# Altium PCB Copy of UAC_V1_1.PcbDoc
Units mm, origin at the board's own origin, x right, y up, seen from the top; angles counter-clockwise.
Board outline 29.34 x 44.07 mm, 4 copper layers (Top Layer, Int1, Int2, Bottom Layer), stack 1.369 mm thick; 82 components, 51 nets, 288 pads, 147 vias.
Unrouted connection lines stored in the file: 11.
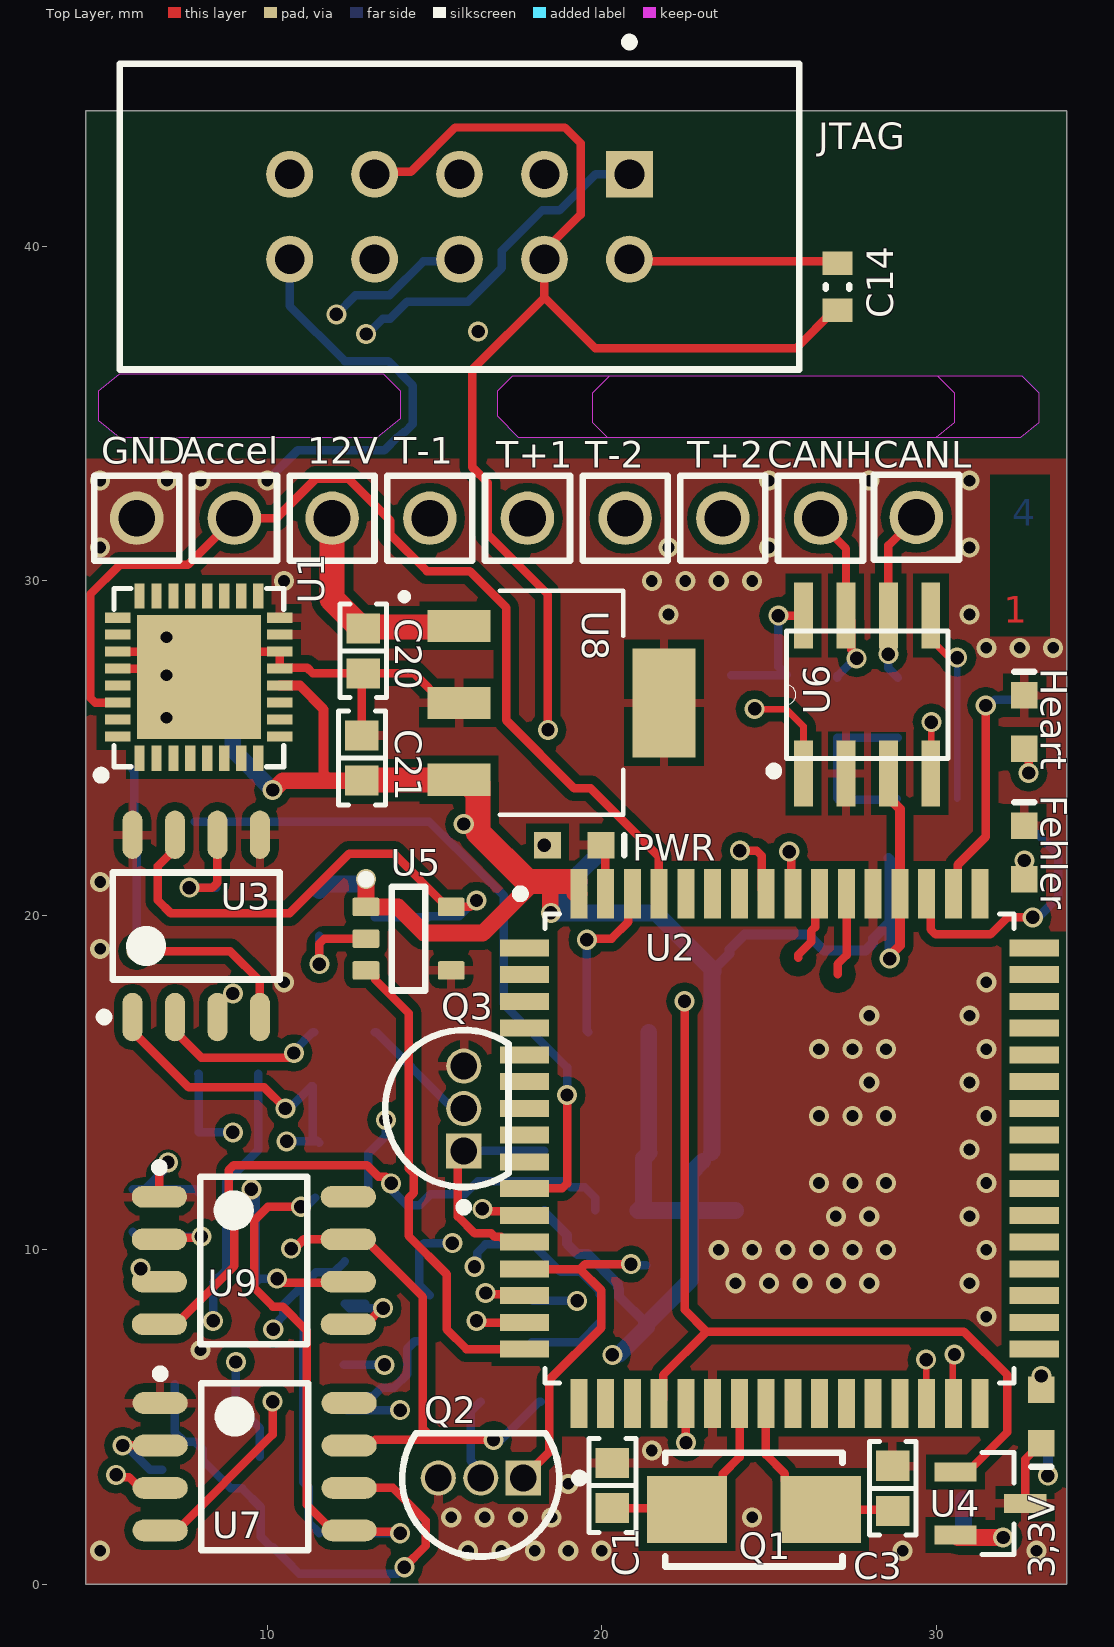
[diagram p0: Top Layer view]
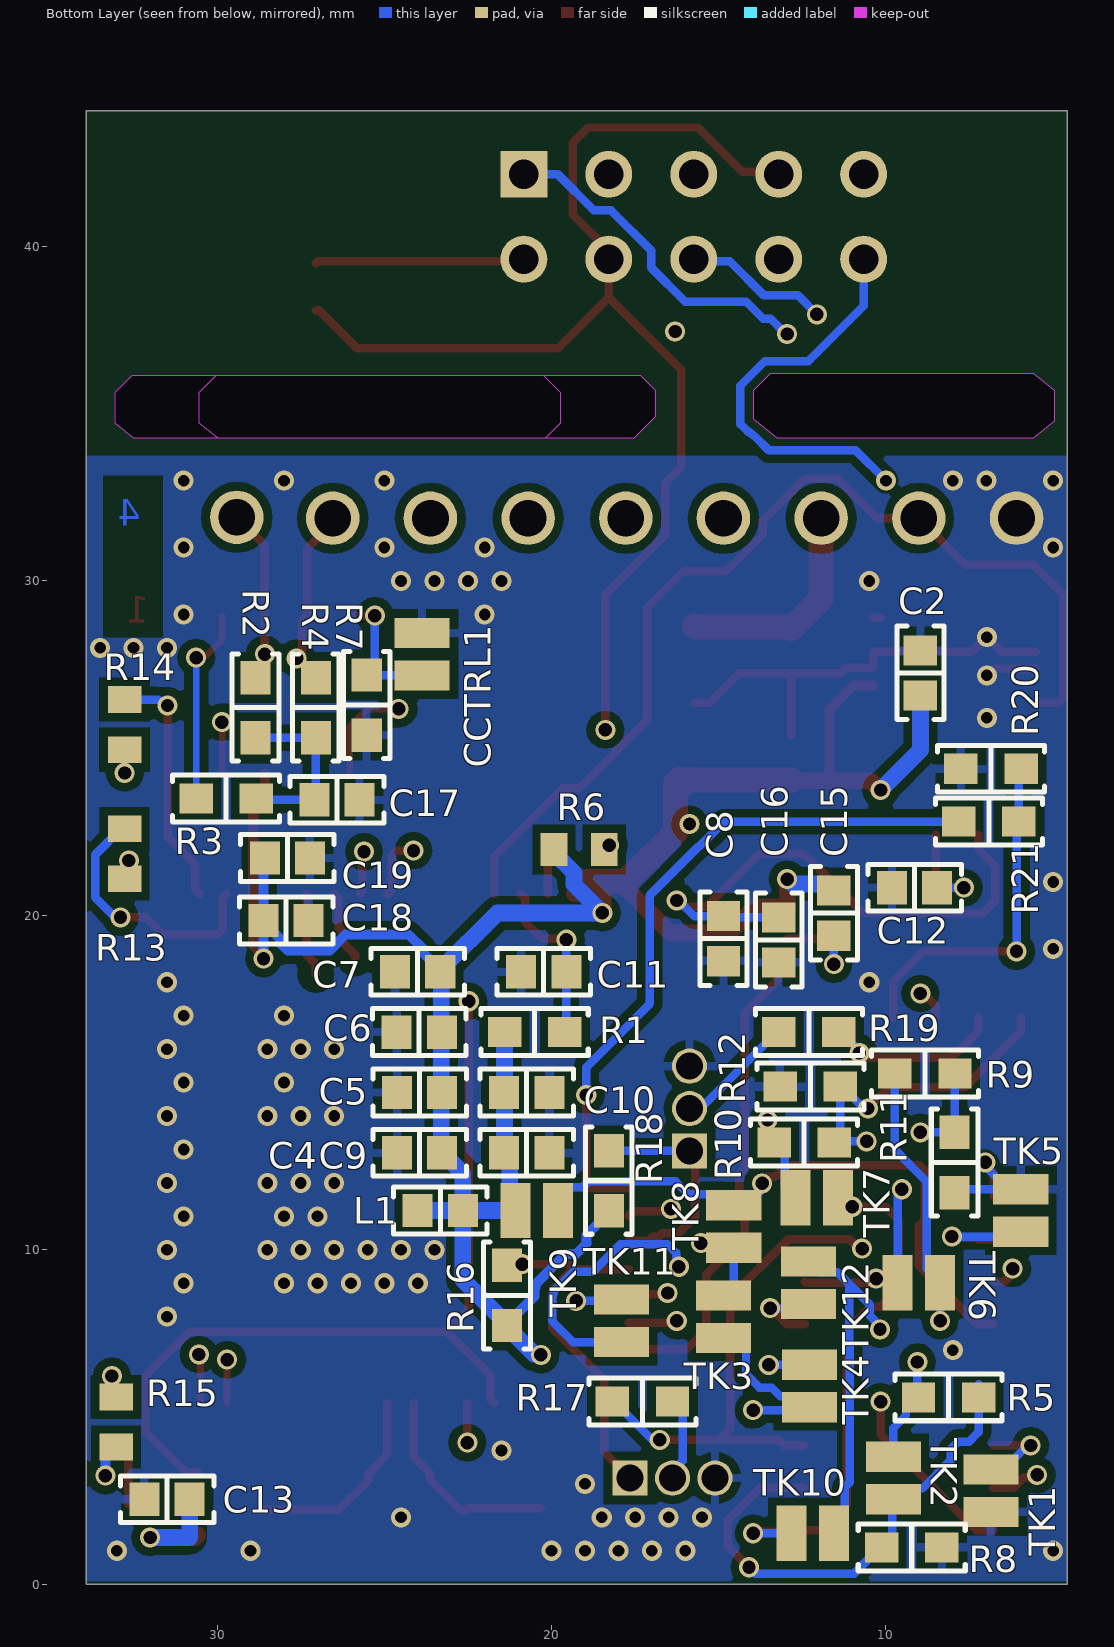
[diagram p1: Bottom Layer view, seen from below]
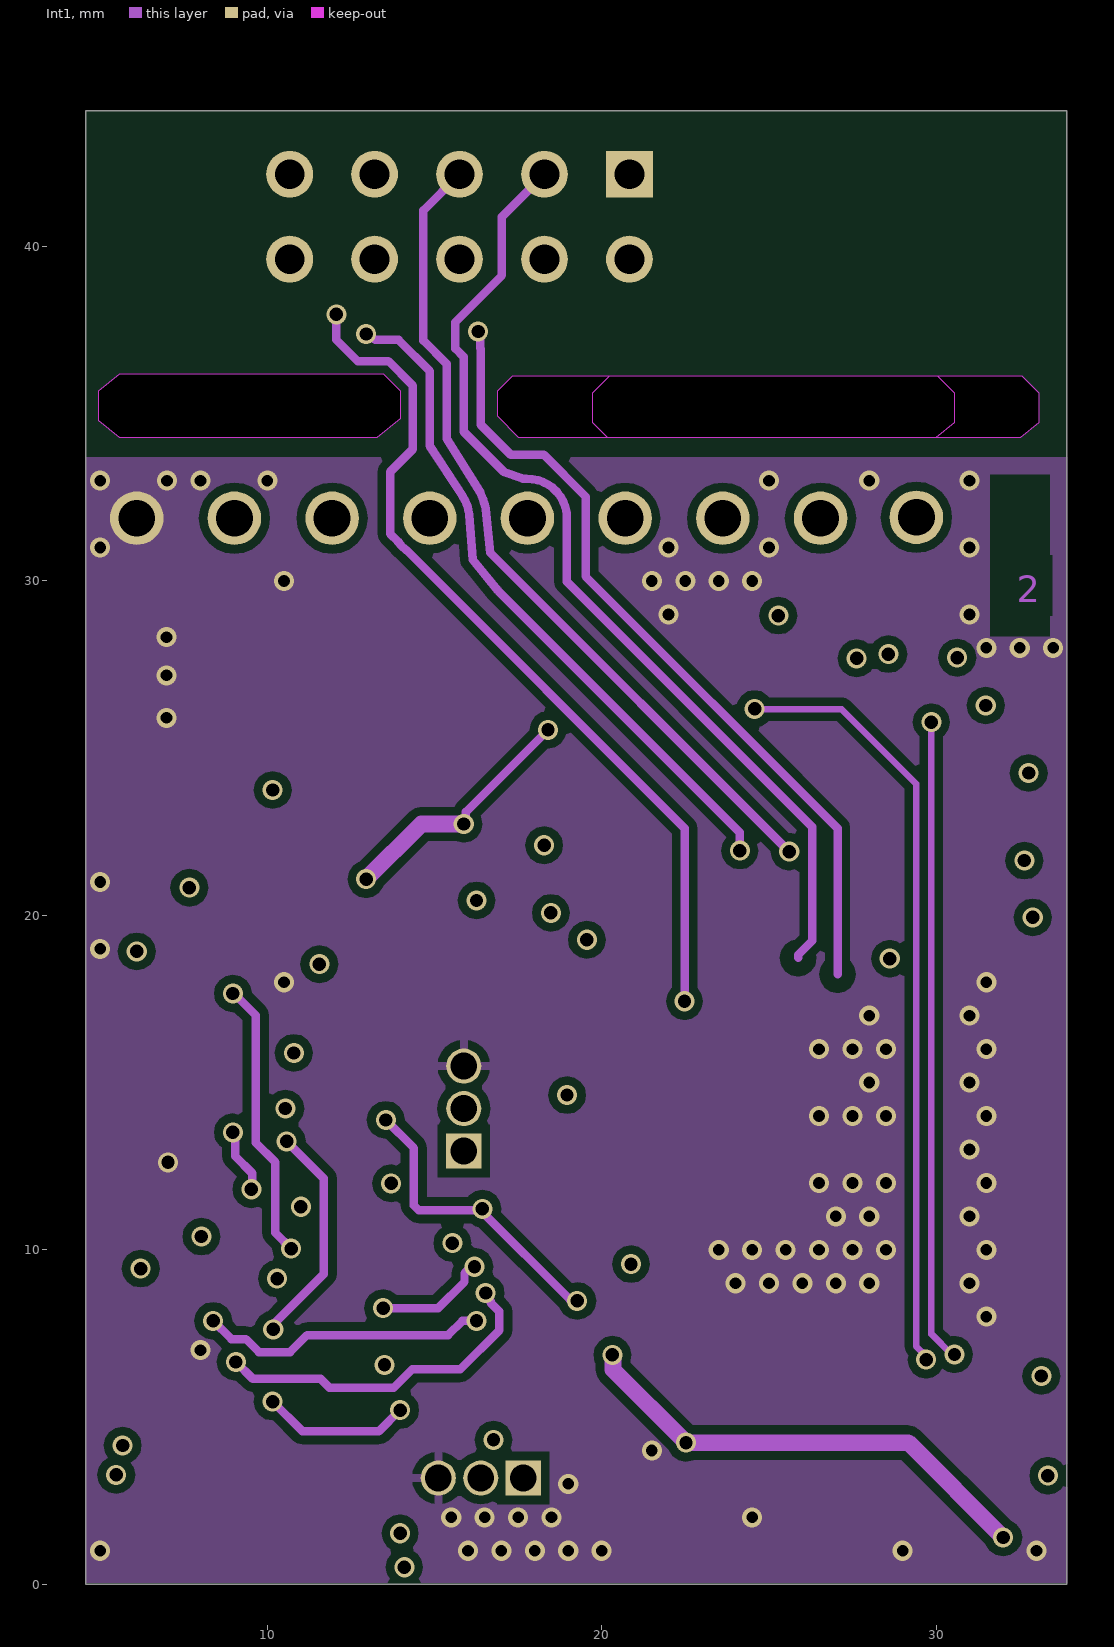
[diagram p2: Int1]
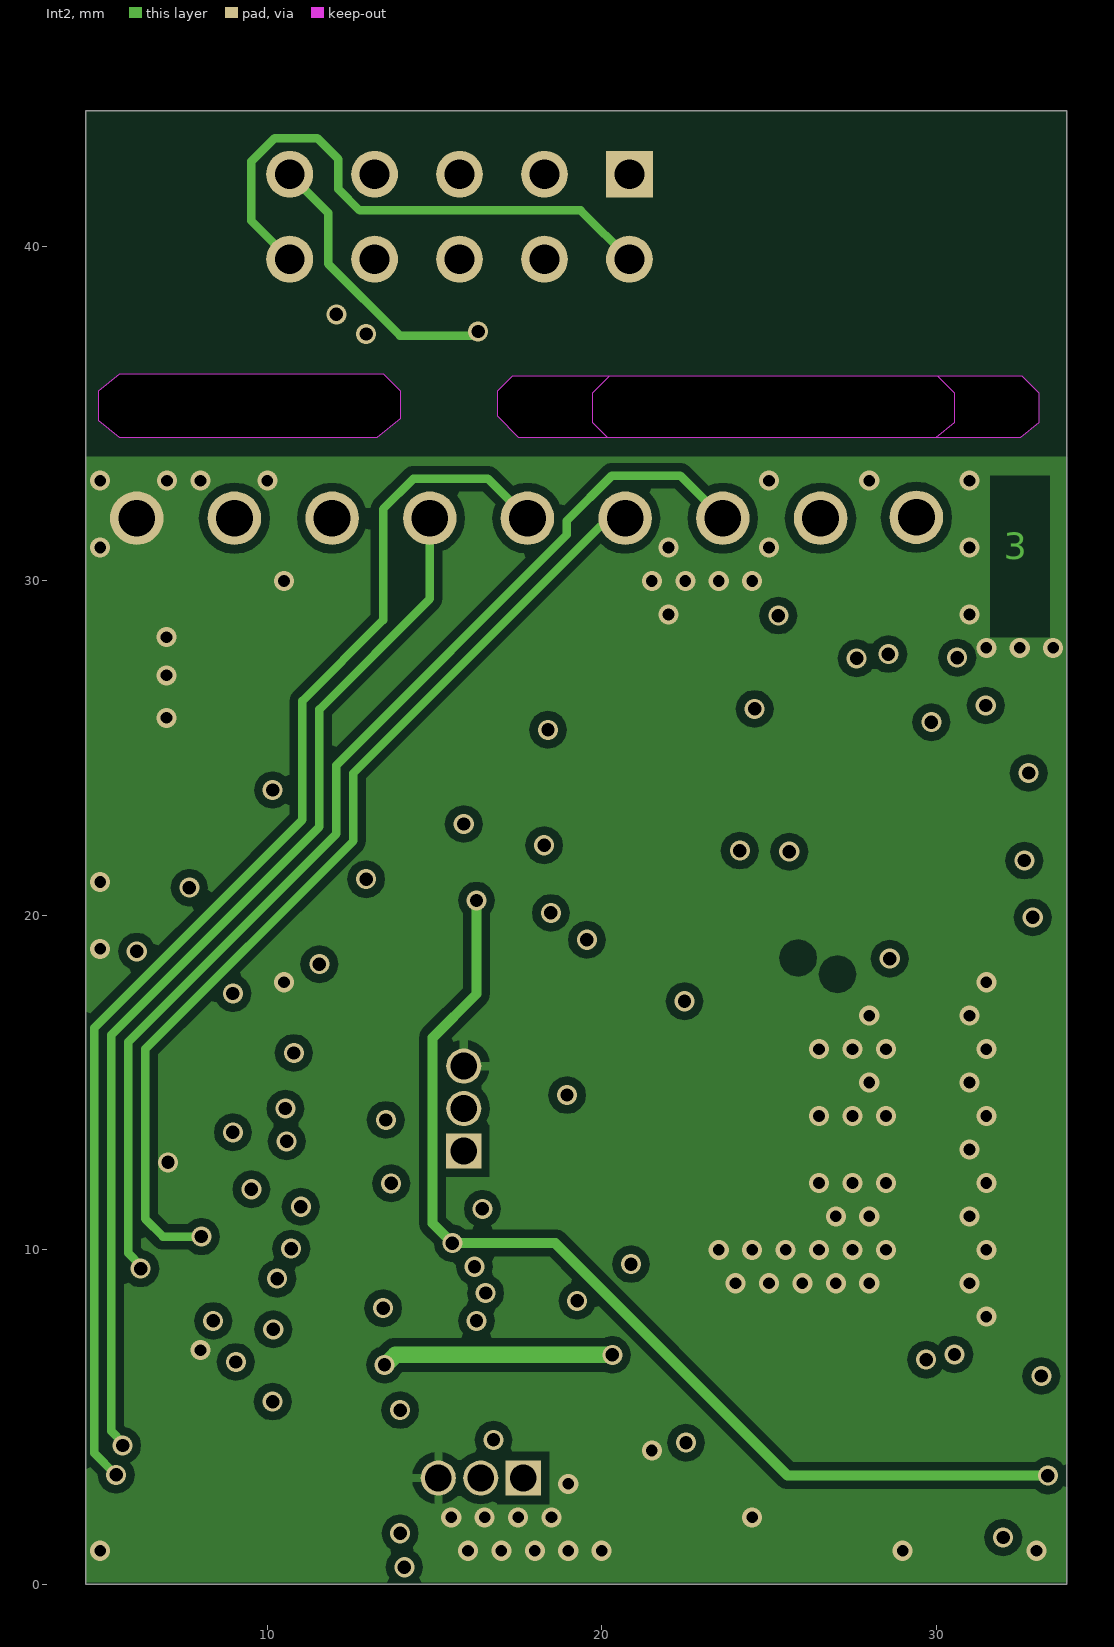
[diagram p3: Int2]

## Layer stack, top to bottom
Top Solder: solder mask 0.0254, SM-001, Dk 4
Top Layer: signal copper 0.035
Dielectric 1: prepreg 0.1295, PP-017, Dk 4.3
Dielectric 2: prepreg 0.1295, PP-017, Dk 4.3
Int1: signal copper 0.035
Dielectric 3: core 0.7112, Core-039, Dk 4.8
Int2: signal copper 0.035
Dielectric 4: prepreg 0.1295, PP-017, Dk 4.3
Dielectric 5: prepreg 0.1295, PP-017, Dk 4.3
Bottom Layer: signal copper 0.035
Bottom Solder: solder mask 0.0254, SM-001, Dk 4

## Board outline
4.572,0 33.909,0 33.909,44.069 4.572,44.069
cut-out: 4.953,34.798 4.953,35.687 5.588,36.195 13.462,36.195 13.97,35.687 13.97,34.849 13.271,34.29 5.588,34.29
cut-out: 19.733,34.734 19.733,35.623 20.241,36.131 32.56,36.131 33.068,35.623 33.068,34.734 32.512,34.29 20.177,34.29
cut-out: 16.891,34.925 16.891,35.687 17.335,36.131 30.035,36.131 30.543,35.623 30.543,34.734 29.988,34.29 17.526,34.29

## Design rules (kind name [scope] priority, off if disabled: settings)
Clearance [All] p1: gap=0.254 ignorepadtopadclearanceinfootprint=FALSE except(0: Arc-Hole Track-Hole SMDPad-Hole THPad-Hole Via-Hole Fill-Hole Poly-Hole Region-Hole Text-Hole)
PolygonConnect [All] p1: connectstyle=Relief reliefconductorwidth=0.254 reliefentries=4 polygonreliefangle="90 Angle" airgapwidth=0.254
RoutingVias [All] p1: holewidth=0.4 width=0.6 viastyle="Through Hole" minholewidth=0.2 minwidth=0.45 maxholewidth=3 maxwidth=5
SolderMaskExpansion [All] p1: expansion=0.102 istentingtop=FALSE
Width [All] p1: maxlimit=2 minlimit=0.15 preferedwidth=0.254 minimp=50.000000 maximp=50.000000 favimp=50.000000
30 further rules are at their usual default settings.

## Components (designator, comment, footprint, x,y, rotation, side; value= is the part's Value field where it differs from the comment)
3,3V "150060GS75000" 0603_A 33.147,5.015 r90 top
12V "61300111121" 61300111121 11.938,31.877 r90 top
Accel "61300111121" 61300111121 9.017,31.877 r90 top
C1 "SMD Capacitor" "CAP 0603/1608" 20.32,2.953 r270 top value=18pF
C2 "SMD Capacitor" "CAP 0603/1608" 8.968,27.252 r90 bottom value=1uF
C3 "SMD Capacitor" "CAP 0603/1608" 28.702,2.866 r270 top value=18pF
C4 "SMD Capacitor" "CAP 0603/1608" 23.947,12.9 r180 bottom value=1uF
C5 "SMD Capacitor" "CAP 0603/1608" 23.947,14.705 r180 bottom value=100nF
C6 "SMD Capacitor" "CAP 0603/1608" 23.957,16.509 r180 bottom value=1uF
C7 "SMD Capacitor" "CAP 0603/1608" 24.004,18.313 r180 bottom value=100nF
C8 "SMD Capacitor" "CAP 0603/1608" 14.859,19.304 r270 bottom value=0,1uF
C9 "SMD Capacitor" "CAP 0603/1608" 20.742,12.9 r180 bottom value=1uF
C10 "SMD Capacitor" "CAP 0603/1608" 20.742,14.705 r180 bottom value=100nF
C11 "SMD Capacitor" "CAP 0603/1608" 20.234,18.313 r0 bottom value=1uF
C12 "SMD Capacitor" "CAP 0603/1608" 9.144,20.828 r0 bottom value=1uF
C13 "SMD Capacitor" "CAP 0603/1608" 31.496,2.54 r0 bottom value=1uF
C14 "100nF 0603" CAPC0603(1608)100_L 27.051,38.797 r90 top value=100nF
C15 "SMD Capacitor 1uF" "CAP 0603/1608" 11.557,20.066 r90 bottom value=1uF
C16 "SMD Capacitor 1uF" "CAP 0603/1608" 13.208,19.264 r90 bottom value=1uF
C17 "SMD Capacitor" "CAP 0603/1608" 26.415,23.456 r180 bottom value=4,7u
C18 "SMD Capacitor" "CAP 0603/1608" 27.939,19.848 r0 bottom
C19 "SMD Capacitor" "CAP 0603/1608" 27.9,21.717 r0 bottom
C20 "SMD Capacitor" "CAP 0603/1608" 12.868,27.91 r90 top value=2u2
C21 "SMD Capacitor" "CAP 0603/1608" 12.828,24.705 r270 top value=1uF
CANH "61300111121" 61300111121 26.543,31.877 r90 top
CANL "61300111121" 61300111121 29.411,31.904 r90 top
CCTRL1 "SMD Jumper open" SMD-JUMPER-OPEN 23.876,27.813 r270 bottom
Fehler "150060GS75000" 0603_A 32.639,21.882 r270 top
GND "61300111121" 61300111121 6.096,31.877 r90 top
Heart "150060GS75000" 0603_A 32.639,25.782 r270 top
JTAG "5103309-1" TECO-5103309-1_V 15.748,40.894 r0 top (schematic designator JTAG1)
L1 "SMD Capacitor" "CAP 0603/1608" 23.328,11.176 r0 bottom value=100nH
PWR "150060GS75000" 0603_A 19.177,22.098 r180 top
Q1 "16M" "NDK NX5032GA" 24.552,2.232 r180 top
Q2 "BC547B" ONSC-TO-92-3-29-11 16.383,3.175 r180 top
Q3 "BC547B" ONSC-TO-92-3-29-11 15.875,14.224 r90 top
R1 "SMD Resistor" "STACKPOLE CSR0603" 20.503,16.509 r0 bottom value=100
R2 "SMD Resistor" "STACKPOLE CSR0603" 28.854,26.211 r270 bottom value="60 0603"
R3 "SMD Resistor" "STACKPOLE CSR0603" 29.729,23.495 r180 bottom value="300 0603"
R4 "SMD Resistor" "STACKPOLE CSR0603" 27.05,26.211 r90 bottom value="60 0603"
R5 "SMD Resistor" "STACKPOLE CSR0603" 8.128,5.588 r0 bottom value="10K 0603"
R6 "RC0603FR-07100RL" RESC1608X55X25ML10T15 19.177,21.971 r180 bottom
R7 "SMD Resistor" "STACKPOLE CSR0603" 25.527,26.289 r90 bottom
R8 "SMD Resistor" "STACKPOLE CSR0603" 9.229,1.1 r0 bottom value="18K 0603"
R9 "SMD Resistor" "STACKPOLE CSR0603" 8.835,15.268 r0 bottom value="10K 0603"
R10 "SMD Resistor" "STACKPOLE CSR0603" 12.446,13.208 r0 bottom value="10K 0603"
R11 "SMD Resistor" "STACKPOLE CSR0603" 7.946,12.612 r90 bottom value="18K 0603"
R12 "SMD Resistor" "STACKPOLE CSR0603" 12.264,14.887 r180 bottom value="18K 0603"
R13 "RC0603FR-07100RL" RESC1608X55X25ML10T15 32.766,21.844 r270 bottom
R14 "RC0603FR-07100RL" RESC1608X55X25ML10T15 32.766,25.705 r270 bottom
R15 "RC0603FR-07100RL" RESC1608X55X25ML10T15 33.02,4.85 r90 bottom
R16 "SMD Resistor" "STACKPOLE CSR0603" 21.336,8.636 r90 bottom value="10k 0603"
R17 "SMD Resistor" "STACKPOLE CSR0603" 17.283,5.461 r180 bottom value="10k 0603"
R18 "SMD Resistor" "STACKPOLE CSR0603" 18.288,12.065 r90 bottom value="10k 0603"
R19 "SMD Resistor" "STACKPOLE CSR0603" 12.308,16.51 r0 bottom value="10k 0603"
R20 "SMD Resistor" "STACKPOLE CSR0603" 6.858,24.384 r180 bottom value="18K 0603"
R21 "SMD Resistor" "STACKPOLE CSR0603" 6.925,22.807 r0 bottom value="10K 0603"
T+1 "61300111121" 61300111121 17.78,31.877 r0 top
T+2 "61300111121" 61300111121 23.622,31.877 r0 top
T-1 "61300111121" 61300111121 14.859,31.877 r0 top
T-2 "61300111121" 61300111121 20.701,31.877 r0 top
TK1 "SMD Jumper open" SMD-JUMPER-OPEN 6.858,2.794 r90 bottom
TK2 "SMD Jumper open" SMD-JUMPER-OPEN 9.779,3.175 r90 bottom
TK3 "SMD Jumper open" SMD-JUMPER-OPEN 14.859,8.001 r270 bottom
TK4 "SMD Jumper open" SMD-JUMPER-OPEN 12.288,5.926 r270 bottom
TK5 "SMD Jumper open" SMD-JUMPER-OPEN 5.969,11.176 r270 bottom
TK6 "SMD Jumper open" SMD-JUMPER-OPEN 9.017,9.017 r180 bottom
TK7 "SMD Jumper open" SMD-JUMPER-OPEN 12.065,11.557 r180 bottom
TK8 "SMD Jumper open" SMD-JUMPER-OPEN 14.55,10.696 r90 bottom
TK9 "SMD Jumper open" SMD-JUMPER-OPEN 20.447,11.176 r180 bottom
TK10 "SMD Jumper open" SMD-JUMPER-OPEN 12.192,1.524 r0 bottom
TK11 "SMD Jumper open" SMD-JUMPER-OPEN 17.907,7.874 r270 bottom
TK12 "SMD Jumper open" SMD-JUMPER-OPEN 12.319,9.017 r270 bottom
U1 "ADXL1001/2" PCBComponent_1 6.174,24.7 r90 top
U2 "AT90CAN128-16AI" *QFP80P1600X1600X120-64N 25.314,13.027 r0 top
U3 "AIS1120SXTR" "SOIC8; SOIC127P600X175-8N" 7.874,19.685 r90 top
U4 "MCP130T-450I/TT" *SOT95P237X112-3N 31.621,2.413 r270 top
U5 "TPS78330DDCT" DDC0005A_L 14.224,19.304 r0 top
U6 "MCP2551/2561" *SOIC127P600X175-8N 27.939,26.603 r90 top
U7 "MAX31855KASA+/MAX6675" SOIC8 9.621,3.513 r0 top value=Value
U8 "LT1118CST-5" *SOT230P700X180-4N 18.797,26.356 r0 top
U9 "MAX31855KASA+/MAX6675" SOIC8 9.597,9.68 r0 top value=Value

## Footprints (in the part's own frame and the unit in brackets; to place one, negate y for a bottom-side part, rotate by r counter-clockwise, add the part's x,y. Pads: shape width x height; smd on the part's side, far side on the other; paste and mask are expansions set on the pad)
0603_A [mm] "Chip LED, 2-Leads, Body 1.6x0.8mm, IPC Medium Density"
  rect 0.8x0.8 smd: 1(-0.8,0) 2(0.8,0)
  silkscreen extent -1.5,-0.3 -1.5,0.3, body extent -0.8,-0.4 0.8,0.4, height 0.7
61300111121 [mm] "1pins, 1 row, straight, gold plating"
  round 1.6 hole 1.1: 1(0,0)
  silkscreen extent -1.27,-1.27 1.27,1.27, body extent -1.27,-1.27 1.27,1.27, height 8.57
*QFP80P1600X1600X120-64N [mil]
  rect 58x20 smd: 1(-300,236) 2(-300,205) 3(-300,173) 4(-300,142) 5(-300,110) 6(-300,79) 7(-300,47) 8(-300,16) 9(-300,-16) 10(-300,-47) 11(-300,-79) 12(-300,-110) 13(-300,-142) 14(-300,-173) 15(-300,-205) 16(-300,-236) 33(300,-236) 34(300,-205) 35(300,-173) 36(300,-142) 37(300,-110) 38(300,-79) 39(300,-47) 40(300,-16) 41(300,16) 42(300,47) 43(300,79) 44(300,110) 45(300,142) 46(300,173) 47(300,205) 48(300,236)
  rect 20x58 smd: 17(-236,-300) 18(-205,-300) 19(-173,-300) 20(-142,-300) 21(-110,-300) 22(-79,-300) 23(-47,-300) 24(-16,-300) 25(16,-300) 26(47,-300) 27(79,-300) 28(110,-300) 29(142,-300) 30(173,-300) 31(205,-300) 32(236,-300) 49(236,300) 50(205,300) 51(173,300) 52(142,300) 53(110,300) 54(79,300) 55(47,300) 56(16,300) 57(-16,300) 58(-47,300) 59(-79,300) 60(-110,300) 61(-142,300) 62(-173,300) 63(-205,300) 64(-236,300)
  silkscreen extent -310,-276 276,305, body extent -270,-270 270,270, height 30
*SOIC127P600X175-8N [mil]
  rect 78x22 smd: 1(-93,75) 2(-93,25) 3(-93,-25) 4(-93,-75) 5(93,-75) 6(93,-25) 7(93,25) 8(93,75)
  silkscreen extent -95,-95 75,115, body extent -75,-95 75,95, height 80
*SOT95P237X112-3N [mil]
  rect 22x50 smd: 1(-37,-41) 2(37,-41) 3(0,41)
  silkscreen extent -60,-10 60,28, body extent -60,-25 60,25, height 50
*SOT230P700X180-4N [mm]
  rect 1.88x0.96 smd: 1(-3.065,2.3) 2(-3.065,0) 3(-3.065,-2.3)
  rect 1.88x3.26 smd: 2(3.065,0)
  silkscreen extent -4.8,-3.35 1.85,3.35, body extent -1.91,-3.43 1.91,3.43, height 1.27
"CAP 0603/1608" [mm] "Chip Capacitor, 2-Leads, Body 1.60x0.80mm, IPC Medium Density"
  rect 0.9x1 smd: 1(-0.675,0) 2(0.675,0)
  silkscreen extent -1.4,-0.7 1.4,0.7, body extent -0.8,-0.41 0.8,0.41, height 0.82
CAPC0603(1608)100_L [mm] "Chip Capacitor, Body 1.6x0.8mm, Height 1.0mm, IPC High Density"
  rect 0.7x0.9 smd: 1(-0.7,0) 2(0.7,0)
  silkscreen extent -0.05,-0.35 0.05,0.35, body extent -0.87,-0.47 0.88,0.48, height 1
DDC0005A_L [mm] "SOT23, 5-Leads, Body 3.05x1.75mm, Pitch 0.95mm, IPC High Density"
  rrect18% 0.8x0.55 smd: 1(-1.275,0.95) 2(-1.275,0) 3(-1.275,-0.95) 4(1.275,-0.95) 5(1.275,0.95)
  silkscreen extent -1.4,-1.55 0.5,1.9, body extent -0.88,-1.52 0.87,1.53, height 1.1
"NDK NX5032GA" [mm] "Crystal, 2-Leads, Body 5.00x3.20mm, IPC Medium Density"
  rect 2.4x2 smd: 1(-2,0) 2(2,0)
  silkscreen extent -2.65,-1.7 2.65,1.7, body extent -2.5,-1.6 2.5,1.6, height 1.2
ONSC-TO-92-3-29-11 [mm] "TO, 3-Leads, Body Dia 4.7mm, Pitch 1.27mm"
  rect 1.05x1.05 hole 0.8: 1(-1.27,0)
  round 1.05 hole 0.8: 2(0,0) 3(1.27,0)
  silkscreen extent -3.08,-1.34 2.35,2.35, body extent -2.35,-1.33 2.36,2.36, height 7.87
PCBComponent_1 [mil]
  rect 30x12 smd: 1(0,0) 2(0,-20) 3(0,-40) 4(0,-60) 5(0,-80) 6(0,-100) 7(0,-120) 8(0,-140) 17(191,-140) 18(191,-120) 19(191,-100) 20(191,-80) 21(191,-60) 22(191,-40) 23(191,-20) 24(191,0)
  rect 12x30 smd: 9(25.5,-165.5) 10(45.5,-165.5) 11(65.5,-165.5) 12(85.5,-165.5) 13(105.5,25.5) 13(105.5,-165.5) 13(125.5,25.5) 13(125.5,-165.5) 15(145.5,-165.5) 16(165.5,-165.5) 25(165.5,25.5) 26(145.5,25.5) 29(85.5,25.5) 30(65.5,25.5) 31(45.5,25.5) 32(25.5,25.5)
  rect 146x146 smd: 13(95.5,-70)
  silkscreen extent -25,-170 200,50, body extent -7,-167 198,28, height 10
RESC1608X55X25ML10T15 [mm] "Chip Resistor, 2-Leads, Body 1.60x0.80mm, IPC Low Density"
  rect 0.8x1 smd: 1(-0.75,0) 2(0.75,0)
  body extent -0.85,-0.45 0.85,0.45, height 0.55
SMD-JUMPER-OPEN [mm] "Jumper, SMD"
  rect 0.9x1.65 smd: 1(-0.635,0) 2(0.635,0)
SOIC8 [mm] "SOIC, 8-Leads, Body 4,90x3,90mm, Pitch 1,27mm, IPC Low Density"
  oval 1.65x0.65 smd: 1(-2.825,1.905) 2(-2.825,0.635) 3(-2.825,-0.635) 4(-2.825,-1.905) 5(2.825,-1.905) 6(2.825,-0.635) 7(2.825,0.635) 8(2.825,1.905)
  silkscreen extent -2.95,-2.5 1.6,2.9, body extent -3,-2.5 3,2.5, height 1.75
"SOIC8; SOIC127P600X175-8N" [mm] "SOIC, 8-Leads, Body 4,90x3,90mm, Pitch 1,27mm, IPC Medium Density"
  oval 1.45x0.6 smd: 1(-2.725,1.905) 2(-2.725,0.635) 3(-2.725,-0.635) 4(-2.725,-1.905) 5(2.725,-1.905) 6(2.725,-0.635) 7(2.725,0.635) 8(2.725,1.905)
  silkscreen extent -2.85,-2.5 1.6,2.88, body extent -2,-2.5 2,2.5, height 1.75
"STACKPOLE CSR0603" [mm] "Chip Resistor, 2-Leads, Body 1.60x0.80mm, IPC Medium Density"
  rect 1x0.9 smd: 1(-0.9,0) 2(0.9,0)
  silkscreen extent -1.6,-0.7 1.6,0.7, body extent -0.85,-0.4 0.85,0.4, height 0.45
TECO-5103309-1_V [mm] "Male Header, 10-Leads, Body 20.32x9.144mm, Pitch 2.54mm"
  rect 1.4x1.4 hole 0.889: 1(5.08,1.27)
  round 1.4 hole 0.889: 2(5.08,-1.27) 3(2.54,1.27) 4(2.54,-1.27) 5(0,1.27) 6(0,-1.27) 7(-2.54,1.27) 8(-2.54,-1.27) 9(-5.08,1.27) 10(-5.08,-1.27)
  silkscreen extent -10.16,-4.57 10.16,5.35, body extent -10.16,-4.57 10.16,4.57, height 9.85

## Part data
3,3V Fehler Heart PWR: library part CMP-1426-00002-1, "SMD mono-color Chip LED, WL-SMCW, Green", Color=Green, Manufacturer="Wuerth Elektronik", ComponentLink1Description="Manufacturer URL", ComponentLink1URL=http://www.we-online.com, ComponentLink2Description=Datasheet, ComponentLink2URL=http://katalog.we-online.com/led/datasheet/150060GS75000.pdf, PackageReference=0603_A, PartNumber=150060GS75000
12V Accel CANH CANL GND T+1 T+2 T-1 T-2: "WR-PHD 2.54 mm THT Pin Header, 1p", Rated Current="3 A", Withstanding Voltage="500 VAC", Working Voltage="250 VAC", ComponentLink1Description=Manufacturer, ComponentLink1URL=http://www.we-online.de, ComponentLink2Description=Datasheet, ComponentLink2URL=http://katalog.we-online.de/em/datasheet/6130xx11121.pdf, Part Number=61300111121, Pin Number=1, Pitch="2.54 mm", Published Date="Aug 2017", Publisher="Wurth Elektronik"
C1 C2 C3 C4 C5 C6 C7 C8 C9 C10 C11 C12 C13 C17 C18 C19 C20 C21 L1: "Capacitor with multiple Footprints"
C14: library part CMP-1035-02579-1, "CAP 100nF 10V ±5% 0603 (1608 Metric) Thickness 1mm SMD", Case-EIA=0603, Case-Metric=1608, Rated Voltage="10 V", Tolerance=Â±5%, Max Thickness="1 mm", Technology=SMT
C15 C16: library part "SMD Capacitor", "Capacitor with multiple Footprints"
JTAG: library part CMP-2000-07502-1, "Male Header, Pitch 2.54 mm, 2 x 5 Position, Height 9.855 mm, Tail Length 3.048 mm, -65 to 105 degC, RoHS, Tube", Colour=Black, Current Rating=1A, Flammability Rating=UL94V-0, Insulation Resistance=5GR, Manufacturer="TE Connectivity", Max Operating Temperature=105degC, Min Operating Temperature=-65degC, Package Description="Male Header, Pitch 2.54 mm, 2 x 5 Position, Height 9.855 mm, Tail Length 3.048 mm", Package Quantity=35, Board Standoff=Yes(With), Body Material=Thermoplastic, Connector System=Wire-to-Board, Connector Type=Header, Contact Gender=Male, Contact Material=CopperAlloy, Contact Mating Length=0.24inch, Contact Plating=Gold, Contact Shape=Square, Datasheet URL=http://www.te.com/commerce/DocumentDelivery/DDEController?Action=showdoc&DocId=Customer+Drawing%7F5103309%7FE1%7Fpdf%7FEnglish%7FENG_CD_5103309_E1.pdf%7F5103309-1, Datasheet Version="Rev. E1, 03/2011", Depth=9.14mm, ELV=Compliant, Gender=Male, Height=8.813mm, Housing Colour=Black, Housing Material=PBT, Lead Free=LeadFree, Length=0.8inch, Manufacturer URL=http://www.te.com/, Mating Alignment=Yes(With), Mating Connector Lock=No(Without), Mating Retention=No(Without), Max Current Rating=1A, Mount=ThroughHole, Mounting Technology=ThroughHole, Number of Contacts=10, Number of Positions=10, Number of Rows=2, Orientation=Straight, Package Reference=5103309-1, Packaging=Rail/Tube, Panel Mount Retention=No(Without), PCB Mount Alignment=No(Without), PCB Mount Retention=Without, PCB Mounting Orientation=Vertical, Pitch=2.54mm, REACH SVHC=NoSVHC, RoHSCompliant=True, Row Spacing=2.54mm, Shrouded=Yes(With), Shrouded End Dimension=3.81mm, Termination=ThroughHole, Termination Post Length=0.12inch
Q1: library part "16 MHz Quartz", "16 MHz Quartz"
Q2 Q3: library part CMP-1048-01467-1, "Amplifier Transistor, NPN Silicon, 3-Pin TO-92, Bulk Box", Manufacturer="On Semiconductor", ComponentLink1Description="Manufacturer URL", ComponentLink1URL=http://www.onsemi.com/, ComponentLink2Description=Datasheet, ComponentLink2URL=http://www.onsemi.com/pub_link/Collateral/BC546-D.PDF, ComponentLink3Description="Package Specification", ComponentLink3URL=http://www.onsemi.cn/pub_link/Collateral/2N6426-D.PDF, DatasheetVersion="Rev. 7", fT Min (MHz)=150, IC Continuous (A)=0.1, Mounting Technology="Through Hole", PackageDescription="3-Pin Transistor Outline, Body 4.825 x 3.685 mm, Pitch 1.27 mm", PackageReference=TO-92-3-29-11_AM_SL, PackageVersion="Rev. AM", Packing="Bulk Box", PartNumber=BC547B, Polarity=NPN, RoHS=FALSE
R1 R2 R3 R4 R5 R7 R8 R9 R10 R11 R12 R16 R17 R18 R19 R20 R21: "Resistor with multiple footprints"
R6 R13 R14 R15: library part CMP-2100-03663-1, "Chip Resistor, 100 Ohm, +/- 1%, 0.1 W, -55 to 155 degC, 0603 (1608 Metric), RoHS, Tape and Reel", Case Code (Imperial)=0603, Case Code (Metric)=1608, Manufacturer=Yageo, Max Operating Temperature=155degC, Min Operating Temperature=-55degC, Package Description="2-Pin Surface Mount Device, Body 1.6 x 0.8 mm", Power Rating=100mW, Resistance=100Ohm, Temperature Coefficient=100ppm/degreesC, Tolerance=1%, Voltage Rating=50V, Case/Package=0603, Composition=ThickFilm, Datasheet URL=http://www.yageo.com/NewPortal/yageodocoutput?fileName=/pdf/R-Chip/PYu-RC_Group_51_RoHS_L_5.pdf, Datasheet Version="Rev. 5, 10/2016", Depth=0.8mm, Height=0.45mm, Lead Free=LeadFree, Length=1.6mm, Manufacturer URL=http://www.yageo.com/, Military Standard=Not, Number of Pins=2, Package Reference=0603, Packaging=TapeandReel, REACH SVHC=Unknown, RoHSCompliant=true, Termination=SMD/SMT, Voltage Rating (DC)=50V, Width=0.8mm
U2: "Ic Mcu 8bit 128kb Flash 64tqfp", Package="TQFP-64 Microchip", Availability=Unavailable, MF=Microchip, MP=AT90CAN128-16AI, Price=None, SnapEDA_Link=https://www.snapeda.com/parts/AT90CAN128-16AI/Microchip/view-part/?ref=snap
U4: "System Supervisors - Power Supply Monitors with Reset Generators Open Drain Low", Package="SOT-23-3 Microchip", Availability=Unavailable, MF=Microchip, MP=MCP120T-450I/TT, Price=None, SnapEDA_Link=https://www.snapeda.com/parts/MCP120T-450I/TT/Microchip/view-part/?ref=snap
U5: library part CMP-0394-01077-2, "Single Output LDO, 150 mA, Fixed 3 V Output, 2.2 to 5.5 V Input, with Ultra-Low IQ, 5-pin SOT (DDC), -40 to 105 degC, Green (RoHS & no Sb/Br)", Manufacturer="Texas Instruments", Rating=Catalog, Accuracy(%)=3, Code_JEDEC=MO-193, ComponentLink1Description="Manufacturer URL", ComponentLink1URL=http://www.ti.com/, ComponentLink2Description=Datasheet, ComponentLink2URL=http://www.ti.com/general/docs/lit/getliterature.tsp?genericPartNumber=TPS78330&fileType=pdf, ComponentLink3Description="Package Specification", ComponentLink3URL=http://www.ti.com/litv/pdf/mpds123d, DatasheetVersion=SBVS133, Eco-Plan="Green (RoHS & no Sb/Br)", Fixed Output Options(V)=3, Iout(Max)(A)=0.15, Iq(Typ)(mA)=0.0005, Mounting Technology="Surface Mount", PackageDescription="5-Pin Plastic Small Outline, Body 2.9 x 1.6 mm, 0.95 mm Pitch", PackageReference=DDC0005A, PackageVersion=4204403-2/E, PartNumber=TPS78330DDCT, SubFamily="Single Channel LDO", Vdo(Typ)(mV)=130, Vin(Max)(V)=5.5, Vin(Min)(V)=2.2, Vout Adj(Max)(V)=3, Vout Adj(Min)(V)=3
U6: library part MCP2551-I/SN, "MCP2551 Series 5.5 V 1 Mb/s Surface Mount High-Speed CAN Transceiver - SOIC-8", Package="SOIC-8 Microchip", Availability=Unavailable, MF=Microchip, MP=MCP2551-I/SN, Price=None, SnapEDA_Link=https://www.snapeda.com/parts/MCP2551-I/SN/Microchip/view-part/?ref=snap
U7 U9: library part MAX31855KASA+, "No Description Available", Built_By=EMA_UL_Team, Copyright="Copyright (C) 2018 Accelerated Designs. All rights reserved", Manufacturer_Part_Number=MAX31855KASA+, RefDes=RefDes, Type=DEV, Vendor="Maxim Integrated Products"
U8: "or UA78M if used topdown (in and out changed)"

## Via types
v1: diameter 0.6, hole 0.35, Top Layer to Bottom Layer, 78 vias
v2: diameter 0.6, hole 0.4, Top Layer to Bottom Layer, 69 vias

## Nets (pads, with @x,y where several pads share a name; then routed paths per layer and width w, separated by ;. In a path a pad name is that pad's centre, name@x,y a point inside that pad or via, vN(x,y) a via of type N, cw(c..) or ccw(c..) an arc to the next point about the centre after c; other vN are vias at no path point)
3,3V: C8.1 C16.2 R15.1 TK3.1 TK8.1 U3.7 U5.5 | length 51.9
  Top Layer w0.254: U3.7 7.239,21.985 6.731,21.477 6.731,20.447 7.112,20.066 10.668,20.066 12.446,21.844 13.784,21.844 15.374,20.254 U5.5 16.063,20.254 v2(16.256,20.447)
  Int2 w0.3: v2(16.256,20.447) 16.256,17.653 14.946,16.343 14.946,10.786 v2(15.535,10.197) 18.612,10.197 25.562,3.246 v2(33.343,3.246)
  Bottom Layer w0.254: C16.2 14.819,19.939 C8.1 15.74,19.979 16.208,20.447 v2(16.256,20.447) ; TK3.1 14.55,8.945 TK8.1 14.686,10.197 v2(15.535,10.197)
  Bottom Layer w0.3: R15.1 33.093,4.1 33.343,3.85 v2(33.343,3.246)
"3,3V EN": U2.16 U5.3 | length 14.5
  Top Layer w0.254: U5.3 13.074,18.354 13.222,18.206 13.222,18.081 14.224,17.079 14.224,12.429 14.385,12.268 14.385,11.704 14.224,11.543 14.224,10.414 15.367,9.271 15.367,7.62 15.954,7.033 U2.16
+5V: C2.1 C4.2 C5.2 C6.2 C7.2 C9.1 C10.1 C13.1 C14.1 C15.2 C18.2 C19.2 C21.2 JTAG.4 JTAG.7 L1.1 L1.2 R1.2 R6.1 R16.1 R18.1 TK4.1 TK9.1 U1.12 U2.21 U2.52 U2.64 U4.2 U5.1 U6.3 U8.3 | length 148
  Top Layer w0.254: JTAG.7 13.278,42.234 14.289,42.234 15.616,43.561 18.901,43.561 19.369,43.093 19.369,40.959 18.288,39.878 JTAG.4 18.288,38.481 ; v2(18.393,25.549) 18.393,29.594 16.599,31.388 16.599,32.931 16.129,33.401 16.129,36.322 18.288,38.481 ; v2(22.52,4.232) U2.21 ; C14.1 26.951,38.097 25.811,36.957 19.812,36.957 18.288,38.481
  Top Layer w0.3: U1.12 10.975,26.871 11.684,26.162 11.684,24.257 11.911,24.03 ; U6.3 28.574,23.529 28.921,23.182 U2.52 28.921,19.096 28.614,18.789 v2(28.614,18.708)
  Top Layer w0.5: v2(10.16,23.749) 10.187,23.749 10.468,24.03 11.911,24.03 C21.2 ; v2(12.954,21.082) 12.949,21.077 U5.1 13.909,20.254 14.688,19.475 16.444,19.475 17.777,20.807 ; U8.3@16.046,23.743 U8.3@16.276,23.973 ; v2@18.46,20.075 18.46,20.647 ; U2.64@19.199,20.647 U2.64 ; U4.2 30.656,1.397 v2(32.004,1.397)
  Top Layer w0.75: C21.2 12.841,24.043 U8.3@15.719,24.043 ; U8.3 16.192,24.056 16.276,23.973 16.297,23.951 16.297,22.488 17.777,21.009 U2.64@19.199,21.009
  Int1 w0.254: v2(15.875,22.733) 15.941,22.799 15.941,23.097 v2(18.393,25.549)
  Int1 w0.5: v2(12.954,21.082) 14.605,22.733 v2(15.875,22.733) ; v2(20.32,6.858) 20.339,6.839 20.339,6.413 v2(22.52,4.232) 29.169,4.232 v2(32.004,1.397)
  Int2 w0.254: v2(13.505,6.561) v2@13.547,6.604
  Int2 w0.5: v2(13.505,6.561) 13.532,6.561 13.828,6.858 v2(20.32,6.858)
  Bottom Layer w0.254: TK4.1 v2(13.505,6.561)
  Bottom Layer w0.3: R18.1 18.288,11.115 18.958,10.445 18.958,10.184 19.271,9.871 19.582,9.871 20.482,8.971 20.482,8.869 20.516,8.835 20.516,8.606 21.336,7.786 R16.1 ; C7.2 23.329,18.363 23.825,18.859 23.825,18.98 24.276,19.431 26.163,19.431 26.41,19.184 26.41,19.181 26.646,18.944 27.881,18.944 28.118,19.181 28.118,19.302 C18.2@28.614,19.798 ; C19.2 28.614,21.678 C18.2 C18.2@28.614,19.798 ; v2(28.614,18.708) C18.2@28.614,19.798
  Bottom Layer w0.5: C2.1 8.968,24.941 v2(10.16,23.749) ; C15.2 11.757,20.941 12.786,20.941 12.927,21.082 v2(12.954,21.082) ; R6.1 19.927,21.871 19.331,21.275 19.331,20.926 v2(18.48,20.075) 21.617,20.075 C7.2@23.329,18.363 ; v2(20.32,6.858) 20.339,6.877 20.527,6.877 21.336,7.686 R16.1 ; R16.1@21.336,7.786 22.653,9.103 L1.1 ; R1.2 21.41,16.502 21.41,12.907 C9.1 21.25,12.733 21.25,11.344 TK9.1 L1.1 ; C4.2@23.022,12.65 22.653,12.282 L1.1 ; C4.2 23.3,12.929 23.3,18.284 C7.2 ; L1.2 L1.1 ; C13.1 30.821,1.397 v2(32.004,1.397)
+12V: 12V.1 C20.2 U8.1 | length 6.6
  Top Layer w0.75: 12V.1 11.938,29.465 12.818,28.585 C20.2 12.904,28.62 15.697,28.62 U8.1
ACC_Analog: Accel.1 U1.30 U2.61 | length 30.4
  Top Layer w0.254: U1.30 4.848,26.363 4.699,26.512 4.699,29.591 5.588,30.48 7.62,30.48 Accel.1 10.268,31.877 11.449,33.058 12.427,33.058 13.678,31.807 13.678,31.388 14.771,30.295 16.052,30.295 17.145,29.203 17.145,25.834 19.18,23.799 19.673,23.799 21.707,21.765 U2.61
CANH: CANH.1 R4.2 U6.7 | length 5.5
  Top Layer w0.254: CANH.1 26.543,31.731 27.305,30.969 27.305,28.966 U6.7 27.456,28.813 27.456,27.949 27.559,27.846 27.559,27.686 v2(27.625,27.686)
  Bottom Layer w0.254: R4.2 27.05,27.161 27.575,27.686 v2(27.625,27.686)
CANL: CANL.1 R2.1 U6.6 | length 5.3
  Top Layer w0.254: v2(28.574,27.814) U6.6 28.574,31.066 29.332,31.824 29.411,31.824 CANL.1
  Bottom Layer w0.254: v2(28.574,27.814) 28.574,27.391 R2.1
CS_ACC: R21.2 U2.10 | length 20.9
  Top Layer w0.254: U2.10 18.815,11.833 18.963,11.982 v2(18.963,14.627)
  Bottom Layer w0.254: R21.2 14.838,22.807 15.593,22.052 15.614,22.052 17.064,20.602 17.064,17.353 18.963,15.454 v2(18.963,14.627)
CS_TYPK_1: R5.2 TK2.2 U2.14 | length 14.5
  Top Layer w0.254: v2(16.528,8.707) 16.565,8.67 17.657,8.67 U2.14
  Int1 w0.254: v2(9.059,6.647) 9.564,6.142 11.591,6.142 11.853,5.88 13.787,5.88 14.337,6.431 15.776,6.431 16.937,7.592 16.937,8.156 16.683,8.41 16.683,8.463 16.528,8.618 v2(16.528,8.707)
  Bottom Layer w0.254: R5.2@9.028,5.418 9.248,5.418 9.401,5.265 9.401,5.045 9.779,4.667 TK2.2 ; R5.2 9.059,5.619 v2(9.059,6.647)
CS_TYPK_2: R9.2 TK6.2 U2.15 | length 18.1
  Top Layer w0.254: v2(16.256,7.874) 16.31,7.82 U2.15
  Int1 w0.254: v2(8.382,7.874) 8.928,7.328 9.362,7.328 9.751,6.939 10.679,6.939 11.187,7.447 15.407,7.447 15.834,7.874 v2(16.256,7.874)
  Bottom Layer w0.254: v2(8.382,7.874) TK6.2 8.777,9.412 8.777,12.032 9.735,12.99 R9.2
Fehler: R13.1 U2.51 | length 7.9
  Top Layer w0.254: U2.51 29.835,20.52 29.835,19.58 29.984,19.431 31.622,19.431 32.13,19.939 v2(32.889,19.939)
  Bottom Layer w0.254: R13.1 32.866,22.594 33.647,21.813 33.647,20.536 33.116,20.005 32.955,20.005 v2(32.889,19.939)
GND: 3,3V.1 C1.1 C2.2 C3.1 C4.1 C5.1 C6.1 C7.1 C8.2 C9.2 C10.2 C11.2 C12.2 C13.2 C14.2 C16.1 C17.2 C18.1 C19.1 C20.1 C21.1 CCTRL1.1 Fehler.1 GND.1 Heart.1 JTAG.2 JTAG.10 PWR.1 Q2.3 Q3.3 R7.1 R8.1 R11.1 R12.1 R20.1 TK1.1 TK5.1 U1.13 U1.15 U1.16 U2.22 U2.53 U2.63 U3.5 U3.8 U4.3 U5.4 U6.2 U7.1 U8.2 U9.1 | length 58.4
  Top Layer w0.254: U1.13@5.527,27.379 6.784,27.379 v1(6.985,27.178) ; U1.13@5.527,27.887 6.551,27.887 v1(6.985,28.321) 7.419,27.887 10.378,27.887 10.378,27.405 11.192,27.405 11.363,27.235 C20.1 ; U9.1 6.772,12.291 7.031,12.55 v2(7.031,12.614) ; U1.16@10.155,28.903 U1.16 ; C21.1 12.828,27.195 C20.1 ; U8.2@15.732,26.356 15.272,26.356 14.394,27.235 C20.1 ; PWR.1 20.107,21.968 U2.63 ; JTAG.2 20.892,39.56 26.987,39.56 C14.2 ; U4.3 32.662,3.73 33.147,4.215
  Int2 w0.254: JTAG.10 9.525,40.767 9.525,42.55 10.22,43.245 11.492,43.245 12.127,42.61 12.127,41.716 12.761,41.082 19.37,41.082 JTAG.2
  Bottom Layer w0.254: TK5.1 TK5.1@6.344,11.811 ; v2(7.031,12.614) 6.965,12.548 6.965,12.432 TK5.1@6.344,11.811 ; R11.1 7.847,11.811 TK5.1@6.344,11.811 ; v1(10,33) 10.909,33.909 13.503,33.909 13.897,34.302 14.104,34.468 14.128,34.468 14.351,34.691 14.351,35.845 13.62,36.576 12.319,36.576 10.668,38.227 JTAG.10
  other v1: 5,1 16,1 17,1 18,1 19,1 20,1 29,1 33,1 15.5,2 16.5,2 17.5,2 18.5,2 24.5,2 19,3 21.5,4 8,7 31.5,8 24,9 25,9 26,9 27,9 28,9 31,9 23.5,10 24.5,10 25.5,10 26.5,10 27.5,10 28.5,10 31.5,10 27,11 28,11 31,11 26.5,12 27.5,12 28.5,12 31.5,12 31,13 26.5,14 27.5,14 28.5,14 31.5,14 28,15 31,15 26.5,16 27.5,16 28.5,16 31.5,16 28,17 31,17 10.5,18 31.5,18 5,19 5,21 6.985,25.908 31.5,28 32.5,28 33.5,28 22,29 31,29 10.5,30 21.5,30 22.5,30 23.5,30 24.5,30 5,31 22,31 25,31 31,31 5,33 7,33 8,33 25,33 28,33 31,33
Heart: R14.1 U2.50 | length 7.4
  Top Layer w0.254: U2.50 30.648,20.774 30.648,21.516 31.484,22.352 v2(31.484,26.277)
  Bottom Layer w0.254: v2(31.484,26.277) 31.578,26.277 31.756,26.455 R14.1
MISO_3,3V: R17.1 U3.3 U7.7 U9.7 | length 24.9
  Top Layer w0.254: U3.3 8.509,17.293 8.88,17.665 v2(8.972,17.665) ; v2(10.714,10.033) 10.808,10.033 11.09,10.315 12.922,10.315 14.651,8.586 14.651,4.653 14.986,4.318 ; U7.7 13.053,4.148 13.223,4.318 14.986,4.318 ; v2(16.764,4.318) 14.986,4.318
  Int1 w0.254: v2(8.972,17.665) 9.005,17.665 9.652,17.018 9.652,13.208 10.241,12.619 10.241,10.506 v2(10.714,10.033)
  Bottom Layer w0.254: v2(16.764,4.318) 16.82,4.318 16.905,4.233 18.133,5.461 R17.1
MISO_5V: Q2.1 R16.2 U2.13 | length 11.2
  Top Layer w0.254: Q2.1 18.431,3.953 18.431,6.112 19.985,7.666 19.985,8.791 19.356,9.42 ; U2.13 18.563,9.42 19.356,9.42 ; v2(20.876,9.573) 19.508,9.573 19.356,9.42
  Bottom Layer w0.254: v2(20.876,9.573) 20.913,9.536 R16.2
MOSI_3,3V: R19.1 U3.2 | length 5.3
  Top Layer w0.254: U3.2 7.239,16.535 8.026,15.748 10.668,15.748 10.794,15.874 v2(10.794,15.887)
  Bottom Layer w0.254: v2(10.794,15.887) 10.794,15.946 11.358,16.51 R19.1
MOSI_5V: Q3.1 R18.2 U2.12 | length 6.8
  Top Layer w0.254: Q3.1 15.702,12.781 15.702,10.993 16.2,10.495 16.691,10.495 16.8,10.386 16.993,10.386 17.071,10.308 17.071,10.268 17.659,10.268 U2.12
  Bottom Layer w0.254: Q3.1 15.886,12.965 R18.2
Net3,3V_2: 3,3V.2 R15.2 | length 1.1
  Top Layer w0.3: 33.147,5.815 v2(33.147,6.225)
  Bottom Layer w0.3: R15.2 33.147,5.727 v2(33.147,6.225)
NetC1_2: C1.2 Q1.2 U2.23 | length 6.2
  Top Layer w0.254: C1.2 22.507,2.278 Q1.2 22.752,2.232 23.625,3.105 23.625,3.305 24.12,3.8 U2.23
NetC3_2: C3.2 Q1.1 U2.24 | length 6.1
  Top Layer w0.254: U2.24 24.908,3.877 25.479,3.305 25.479,3.105 26.352,2.232 Q1.1 28.661,2.232 C3.2
NetC11_1: C11.1 R1.1 U2.62 | length 5.1
  Top Layer w0.254: v2(19.558,19.271) 19.591,19.304 20.293,19.304 20.793,19.804 20.793,20.52 U2.62
  Bottom Layer w0.254: v2(19.558,19.271) 19.558,16.554 R1.1
NetC12_1: C12.1 U3.6 | length 3.1
  Top Layer w0.254: v2(7.67,20.828) 8.36,20.828 8.509,20.977 U3.6
  Bottom Layer w0.254: v2(7.67,20.828) C12.1
NetC15_1: C15.1 U5.2 | length 2.9
  Top Layer w0.254: v2(11.557,18.542) 11.557,19.155 11.706,19.304 U5.2
  Bottom Layer w0.254: v2(11.557,18.542) C15.1
NetC17_1: C17.1 R2.2 R3.2 R4.1 | length 5.4
  Bottom Layer w0.254: R3.2 28.79,23.456 C17.1 27.05,23.496 R4.1 R2.2
NetCCTRL1_2: CCTRL1.2 R7.2 U6.8 | length 4.3
  Top Layer w0.254: v2(25.282,28.965) U6.8
  Bottom Layer w0.254: CCTRL1.2 25.516,27.178 R7.2 25.282,27.434 v2(25.282,28.965)
NetFehler_2: Fehler.2 R13.2 | length 1.2
  Top Layer w0.254: Fehler.2 v2(32.639,21.64)
  Bottom Layer w0.254: v2(32.639,21.64) 32.639,21.221 R13.2
NetHeart_2: Heart.2 R14.2 | length 1.5
  Top Layer w0.254: Heart.2 32.766,24.855 v2(32.766,24.257)
  Bottom Layer w0.254: v2(32.766,24.257) R14.2
NetJTAG1_1: JTAG.1 U2.57 | length 32.4
  Top Layer w0.254: v2(24.13,21.938) 24.632,21.938 24.781,21.789 24.781,20.774 U2.57
  Int1 w0.254: v2(12.956,37.384) 13.05,37.384 13.223,37.211 13.926,37.211 14.859,36.278 14.859,34.04 15.847,32.523 cw(c14.859,31.877) 16.036,31.972 16.146,30.635 16.9,29.711 16.917,29.692 24.13,22.479 v2(24.13,21.938)
  Bottom Layer w0.254: v2(12.956,37.384) 12.996,37.384 13.458,37.846 13.677,37.846 14.185,38.354 16.007,38.354 17.018,39.365 17.018,39.883 18.218,41.083 18.736,41.083 19.817,42.164 JTAG.1
NetJTAG1_3: JTAG.3 U2.55 | length 31.7
  Top Layer w0.254: 25.871,18.727 25.871,18.821 26.26,19.209 26.26,19.529 26.381,19.651 26.381,20.52 U2.55
  Int1 w0.254: 17.742,33.058 17.637,33.058 17.07,33.265 15.875,34.461 15.875,36.699 15.624,36.95 15.624,37.744 17.018,39.137 17.018,40.894 JTAG.3 ; 17.743,33.058 17.749,33.058 cw(c17.78,31.877) 18.961,31.856 18.961,31.841 ccw(c19.469,31.839) 18.961,31.839 18.961,29.978 19.035,29.903 26.289,22.65 26.289,19.238 25.871,18.821 25.871,18.727
NetJTAG1_5: JTAG.5 U2.56 | length 26.3
  Top Layer w0.254: v2(25.608,21.904) 25.664,21.848 25.664,20.704 U2.56
  Int1 w0.254: JTAG.5 14.667,41.083 14.667,37.189 15.367,36.489 15.367,34.25 16.355,32.674 16.413,32.54 cw(c14.859,31.877) 16.485,32.334 16.538,32.146 16.673,30.839 v2(25.608,21.904)
NetJTAG1_9: JTAG.9 U2.54 | length 35.4
  Top Layer w0.254: 27.051,18.24 27.051,18.542 27.321,18.812 U2.54
  Int1 w0.254: v2(16.305,37.462) 16.372,37.395 16.372,36.956 16.383,36.944 16.383,34.671 17.281,33.773 18.272,33.773 19.52,32.526 19.52,30.137 27.051,22.606 27.051,18.24
  Int2 w0.254: JTAG.9 11.824,41.008 11.824,39.479 13.965,37.338 16.088,37.338 16.212,37.462 v2(16.305,37.462)
NetPWR_2: PWR.2 R6.2 | length 0.3
  Top Layer w0.254: v2(18.277,22.098) PWR.2
  Bottom Layer w0.254: v2(18.277,22.098) 18.3,22.098 R6.2
NetQ2_2: Q2.2 R17.2 | length 2.5
  Bottom Layer w0.254: Q2.2 16.383,3.39 16.083,3.69 16.083,5.161 R17.2
NetQ3_2: Q3.2 R19.2 | length 3.6
  Bottom Layer w0.254: R19.2 13.258,16.51 15.392,14.376 15.723,14.376 Q3.2
NetR3_1: R3.1 U6.5 | length 5.9
  Top Layer w0.2: U6.5 29.844,28.254 30.313,27.785 30.552,27.785 v2(30.629,27.708)
  Bottom Layer w0.2: R3.1 v2(30.629,27.708)
NetR5_1: R5.1 R8.2 TK2.1 U7.6 | length 15.2
  Top Layer w0.254: U7.6 13.759,2.878 14.732,1.905 14.732,1.143 v2(14.097,0.508)
  Bottom Layer w0.254: R5.1@7.228,5.973 7.228,4.547 7.515,4.26 7.841,4.26 8.064,4.037 8.064,3.711 8.912,2.863 9.244,2.863 9.806,2.301 9.806,1.423 R8.2 10.179,1.1 10.726,0.553 10.726,0.541 10.949,0.318 13.907,0.318 v2(14.097,0.508)
NetR9_1: R9.1 R11.2 TK6.1 U9.6 | length 10.5
  Top Layer w0.254: v2(10.296,9.135) 10.414,9.017 12.394,9.017 U9.6
  Int1 w0.254: v2(8.971,13.512) 9.037,13.446 9.037,12.804 9.55,12.291 9.55,11.836 v2(9.525,11.811)
  Bottom Layer w0.254: R9.1 7.946,15.257 R11.2 v2(8.971,13.512) ; v2(9.525,11.811) 9.525,11.717 9.652,11.59 TK6.1 9.77,9.135 v2(10.296,9.135)
NetR20_2: R20.2 R21.1 U3.4 | length 10.6
  Top Layer w0.254: v2(6.096,18.923) 8.89,18.923 9.779,18.034 U3.4
  Bottom Layer w0.254: R20.2 6.025,24.317 R21.1 6.096,22.737 v2(6.096,18.923)
NetTK3_2: TK3.2 TK4.2 U7.4 | length 15.2
  Top Layer w0.254: U7.4 7.296,1.608 10.16,4.472 v2(10.16,5.461)
  Int1 w0.254: v2(10.16,5.461) 11.049,4.572 13.335,4.572 v2(13.97,5.207)
  Bottom Layer w0.254: v2(13.97,5.207) 12.372,5.207 TK4.2 12.611,5.614 13.155,5.614 13.421,5.88 13.787,5.88 14.186,6.279 14.186,7.043 14.41,7.267 TK3.2@14.55,7.267
NetTK7_2: TK7.2 TK10.2 U7.5 | length 15.7
  Top Layer w0.254: v2(11.003,11.287) 10.017,11.287 9.615,10.885 9.615,8.853 10.167,8.301 10.46,8.301 11.176,7.585 11.176,2.378 11.946,1.608 U7.5 12.488,1.566 13.928,1.566 v2(13.97,1.524)
  Bottom Layer w0.254: v2(11.003,11.287) 11.16,11.287 TK7.2 ; TK10.2 v2(13.97,1.524)
NetTK8_2: TK8.2 TK9.2 U9.4 | length 18.4
  Top Layer w0.254: U9.4 7.272,7.775 9.017,9.52 9.017,10.72 8.844,10.893 8.844,12.378 8.993,12.527 12.978,12.527 13.321,12.185 13.543,12.185 13.704,12.024 v2(13.704,11.986)
  Bottom Layer w0.254: v2(13.704,11.986) 13.77,11.92 13.77,11.736 14.175,11.331 TK8.2 14.873,11.654 15.898,11.654 16.29,12.046 18.896,12.046 19.068,11.874 19.489,11.874 19.812,11.551 TK9.2
NetTK11_2: TK11.2 TK12.2 U9.5 | length 14.5
  Top Layer w0.254: U9.5 12.952,7.775 13.432,8.255 v2(13.462,8.255)
  Int1 w0.254: v2(13.462,8.255) 15.113,8.255 15.897,9.039 15.897,9.298 16.092,9.493 v2(16.194,9.493)
  Bottom Layer w0.254: TK12.2@12.935,8.382 TK12.2 12.446,8.255 v2(13.462,8.255) ; v2(16.194,9.493) 16.261,9.559 16.261,9.755 16.274,9.769 16.274,9.909 16.524,10.16 17.948,10.16 18.768,9.34 19.362,9.34 19.948,8.754 19.948,8.652 19.985,8.615 19.985,7.862 19.362,7.239 TK11.2
Reset: JTAG.6 U2.20 U4.1 | length 56.5
  Top Layer w0.254: U2.20 21.834,5.534 21.834,6.251 23.135,7.551 ; v2(22.476,17.433) 22.476,8.21 23.135,7.551 ; U4.1 30.935,3.353 32.131,4.549 32.131,6.252 30.831,7.551 23.135,7.551
  Int1 w0.254: v2(12.065,37.973) 12.065,37.211 12.7,36.576 13.62,36.576 14.351,35.845 14.351,35.814 14.351,33.937 13.678,33.264 13.678,31.407 13.907,31.178 ccw(c14.859,31.877) 14.16,30.925 22.479,22.606 22.479,17.436 v2(22.476,17.433)
  Bottom Layer w0.254: v2(12.065,37.973) 12.635,38.543 13.656,38.543 14.667,39.554 15.678,39.554 JTAG.6
RX_CAN: U2.31 U6.4 | length 22.3
  Top Layer w0.2: U6.4 29.851,24.248 29.851,25.772 v2(29.858,25.78) ; U2.31 30.501,5.428 30.501,6.822 v2(30.549,6.87)
  Int1 w0.2: v2(29.858,25.78) 29.858,7.48 30.468,6.87 v2(30.549,6.87)
SCK_SPI_3,3V: R10.1 R12.2 TK10.1 TK12.1 U3.1 | length 27.3
  Top Layer w0.254: U3.1 5.969,16.535 7.645,14.859 9.906,14.859 v2(10.541,14.224)
  Int1 w0.254: v2(10.178,7.62) 10.178,7.765 11.684,9.271 11.684,12.139 v2(10.578,13.245)
  Bottom Layer w0.254: v2(10.178,7.62) 10.178,7.714 10.351,7.887 10.351,7.902 10.483,8.034 10.483,8.36 11.095,8.972 ; v2(10.541,14.224) 10.607,14.29 10.717,14.29 11.314,14.887 R12.2 11.364,13.358 R10.1@11.477,13.245 ; v2(10.578,13.245) R10.1@11.477,13.245 ; R10.1 11.509,13.245 R10.1@11.477,13.245 ; TK10.1 11.234,1.847 11.234,2.899 11.082,3.051 11.082,7.169 11.095,7.182 11.095,8.972 ; TK12.1 11.996,9.329 11.452,9.329 11.095,8.972
SCK_SPI_5V: R10.2 TK7.1 TK11.1 U2.11 | length 14.4
  Top Layer w0.254: v2(16.433,11.226) 16.526,11.226 16.604,11.148 17.567,11.148 U2.11
  Int1 w0.254: v2(13.543,13.883) 14.385,13.041 14.385,11.325 14.534,11.176 v2@16.383,11.176 ; v2(16.433,11.226) v2@16.383,11.176 ; v2(19.267,8.472) 19.23,8.509 19.05,8.509 v2@16.383,11.176
  Bottom Layer w0.254: TK7.1 13.023,11.88 13.023,12.885 13.543,13.405 v2(13.543,13.883) ; TK11.1 17.944,8.472 v2(19.267,8.472)
T+1: T+1.1 U7.3 | length 39.4
  Top Layer w0.254: v2(5.479,3.269) 5.545,3.203 5.864,3.203 6.189,2.878 U7.3
  Int2 w0.254: v2(5.479,3.269) 4.826,3.922 4.826,16.637 11.049,22.86 11.049,26.416 13.462,28.829 13.462,32.15 14.37,33.058 16.599,33.058 T+1.1
T+2: T+2.1 U9.3 | length 34.5
  Top Layer w0.254: v2(6.212,9.438) 6.279,9.372 6.279,9.228 6.462,9.045 U9.3
  Int2 w0.254: v2(6.212,9.438) 6.212,9.532 5.842,9.902 5.842,16.216 12.065,22.439 12.065,24.492 18.961,31.388 18.961,31.807 20.301,33.147 22.352,33.147 T+2.1
T-1: T-1.1 TK1.2 U7.2 | length 34.4
  Top Layer w0.254: v2(5.672,4.148) U7.2
  Int2 w0.254: v2(5.672,4.148) 5.672,4.242 5.334,4.581 5.334,16.427 11.557,22.65 11.557,26.162 14.859,29.464 T-1.1
  Bottom Layer w0.254: v2(5.672,4.148) 5.764,4.148 6.483,3.429 TK1.2
T-2: T-2.1 TK5.2 U9.2 | length 32.5
  Top Layer w0.254: U9.2 7.23,10.315 7.27,10.356 7.989,10.356 v2(8.029,10.396)
  Int2 w0.254: v2(8.029,10.396) 6.876,10.396 6.35,10.922 6.35,16.006 12.573,22.229 12.573,24.257 19.935,31.619 20.443,31.619 T-2.1
  Bottom Layer w0.254: TK5.2 6.114,10.396 v2(8.029,10.396)
TX_CAN: U2.30 U6.1 | length 27.5
  Top Layer w0.2: v2(24.573,26.174) 24.585,26.162 25.527,26.162 26.035,25.654 26.035,24.242 U6.1 ; v2(29.7,6.713) 29.704,6.709 29.704,5.411 U2.30
  Int1 w0.2: v2(24.573,26.174) 24.585,26.162 27.178,26.162 29.404,23.936 29.404,7.117 29.7,6.821 v2(29.7,6.713)
pads on no net: JTAG.8 U1.1 U1.2 U1.3 U1.4 U1.5 U1.6 U1.7 U1.8 U1.9 U1.10 U1.11 U1.17 U1.18 U1.19 U1.20 U1.21 U1.22 U1.23 U1.24 U1.25 U1.26 U1.29 U1.31 U1.32 U2.1 U2.2 U2.3 U2.4 U2.5 U2.6 U2.7 U2.8 U2.9 U2.17 U2.18 U2.19 U2.25 U2.26 U2.27 U2.28 U2.29 U2.32 U2.33 U2.34 U2.35 U2.36 U2.37 U2.38 U2.39 U2.40 U2.41 U2.42 U2.43 U2.44 U2.45 U2.46 U2.47 U2.48 U2.49 U2.58 U2.59 U2.60 U7.8 U9.8

## Polygon pours and split planes (outlines as drawn)
GND on Top Layer "GND_L01_P004" (solid, pour order 4): 4.572,33.655 33.909,33.655 33.909,0.01 33.899,0 4.572,0
GND on Int1 "GND_L02_P005" (solid, pour order 5): 4.591,33.693 33.928,33.693 33.928,0.048 33.918,0.038 4.591,0.038
GND on Int2 "GND_L03_P006" (solid, pour order 6): 4.591,33.717 33.928,33.717 33.928,0.072 33.918,0.062 4.591,0.062
GND on Bottom Layer "GND_L04_P007" (solid, pour order 7): 4.591,33.741 33.928,33.741 33.928,0.097 33.918,0.086 4.591,0.086

## Other copper
Top Layer:
  pour cut-out: 31.623,28.346 33.401,28.346 33.401,33.172 31.623,33.172
  text "1" at 32.027,28.75 h0.8
Int1:
  pour cut-out: 31.623,28.346 33.401,28.346 33.401,33.172 31.623,33.172
  text "2" at 32.408,29.36 h0.8
Int2:
  pour cut-out: 31.623,28.321 33.401,28.321 33.401,33.147 31.623,33.147
  text "3" at 32.027,30.655 h0.8
Bottom Layer:
  pour cut-out: 31.623,28.321 33.401,28.321 33.401,33.147 31.623,33.147
  text "4" at 32.281,31.646 h0.8